# Altium PCB Ej6_Placa.PcbDoc
Units mm, origin at the board's own origin, x right, y up, seen from the top; angles counter-clockwise.
Board outline 50 x 50 mm, 2 copper layers (Top Layer, Bottom Layer); 24 components, 17 nets, 57 pads, 2 vias.
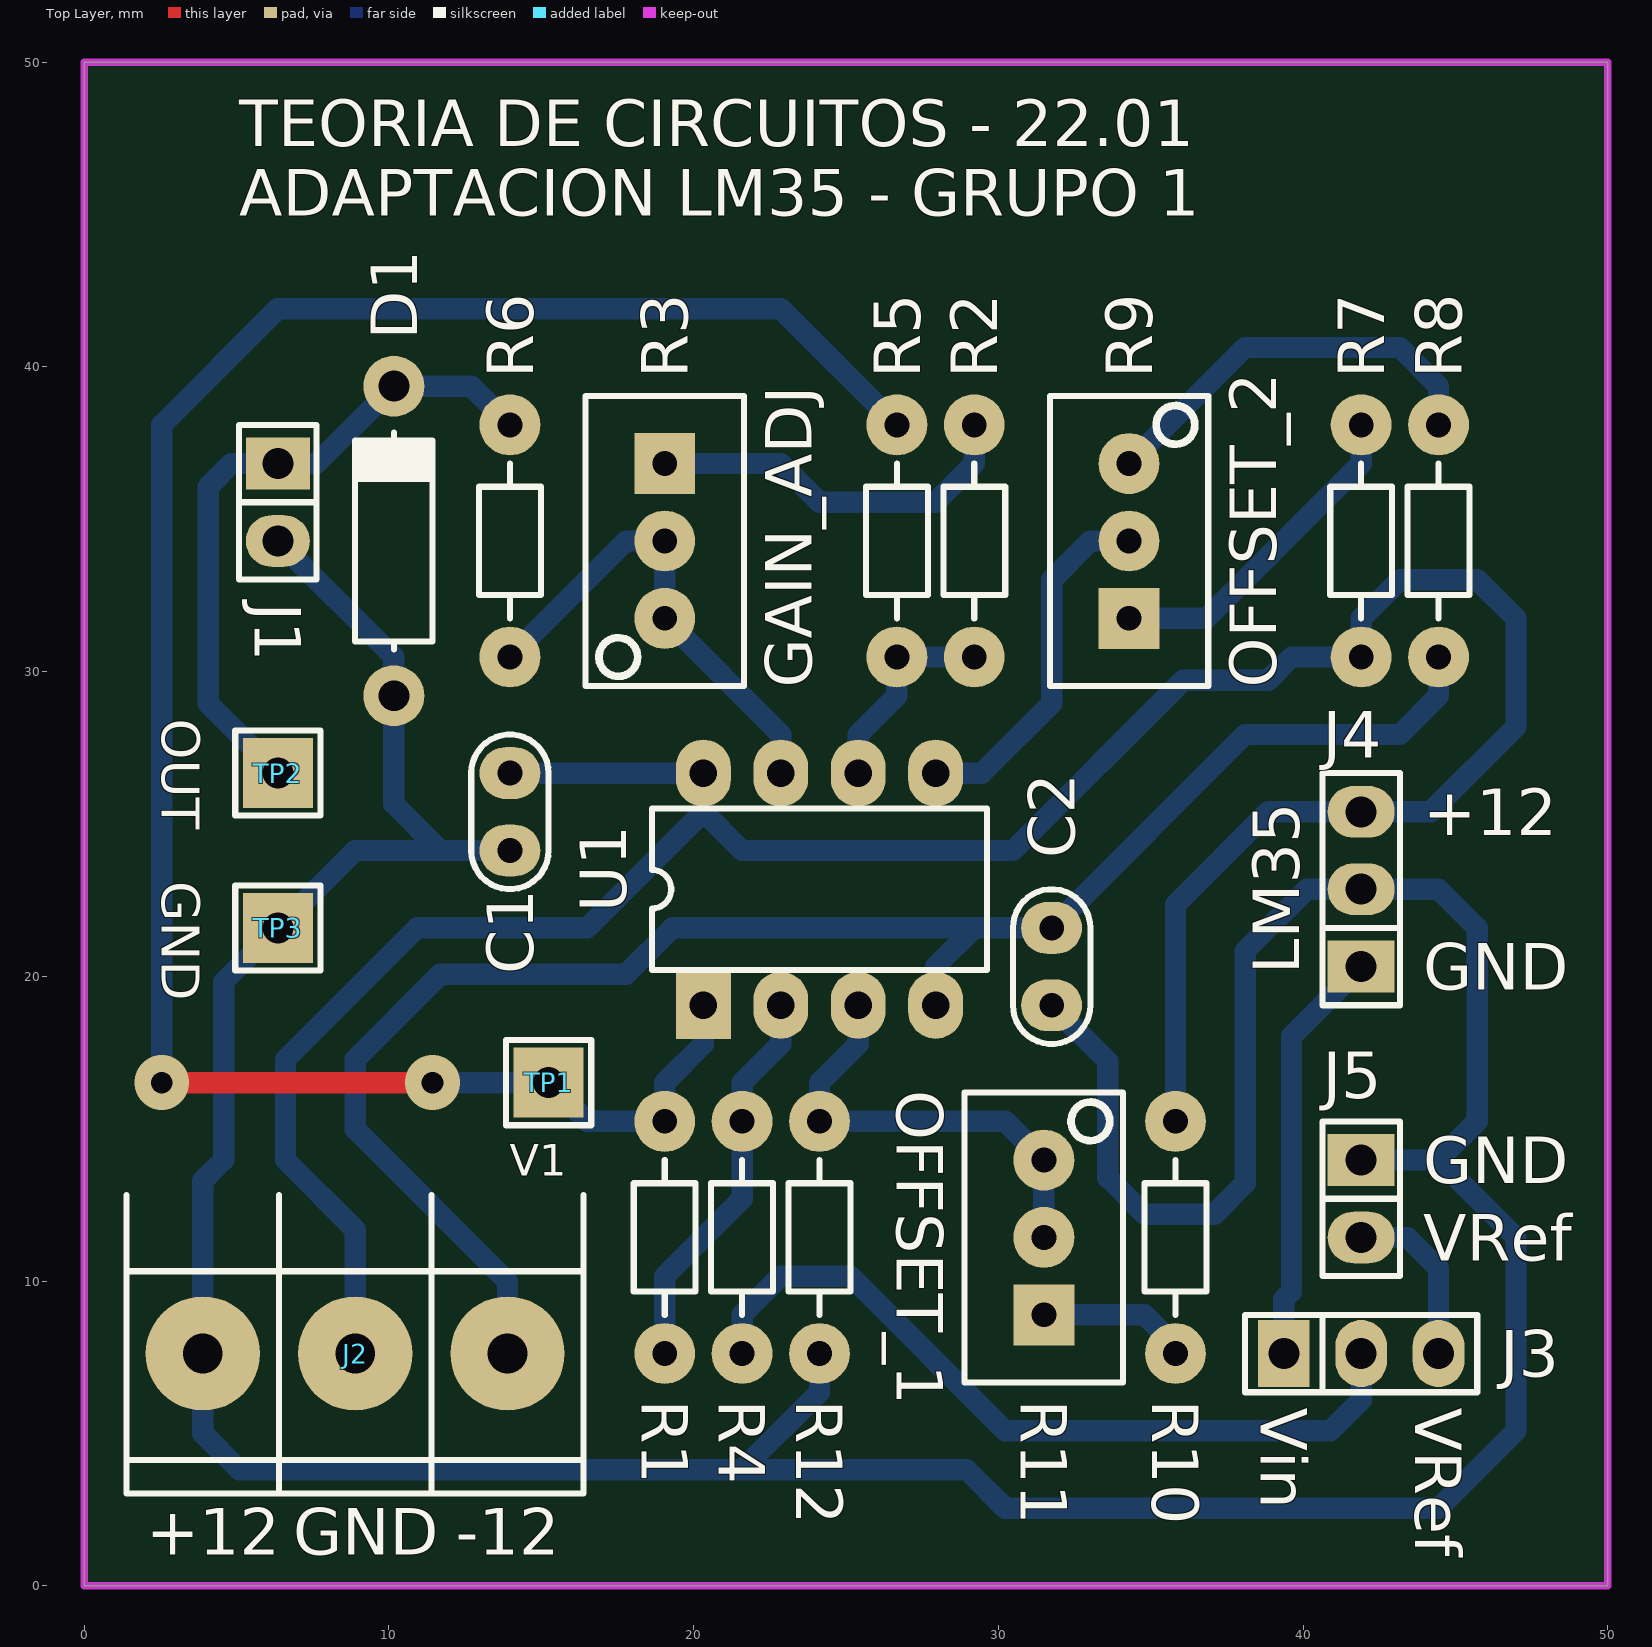
[diagram p0: Top Layer view]
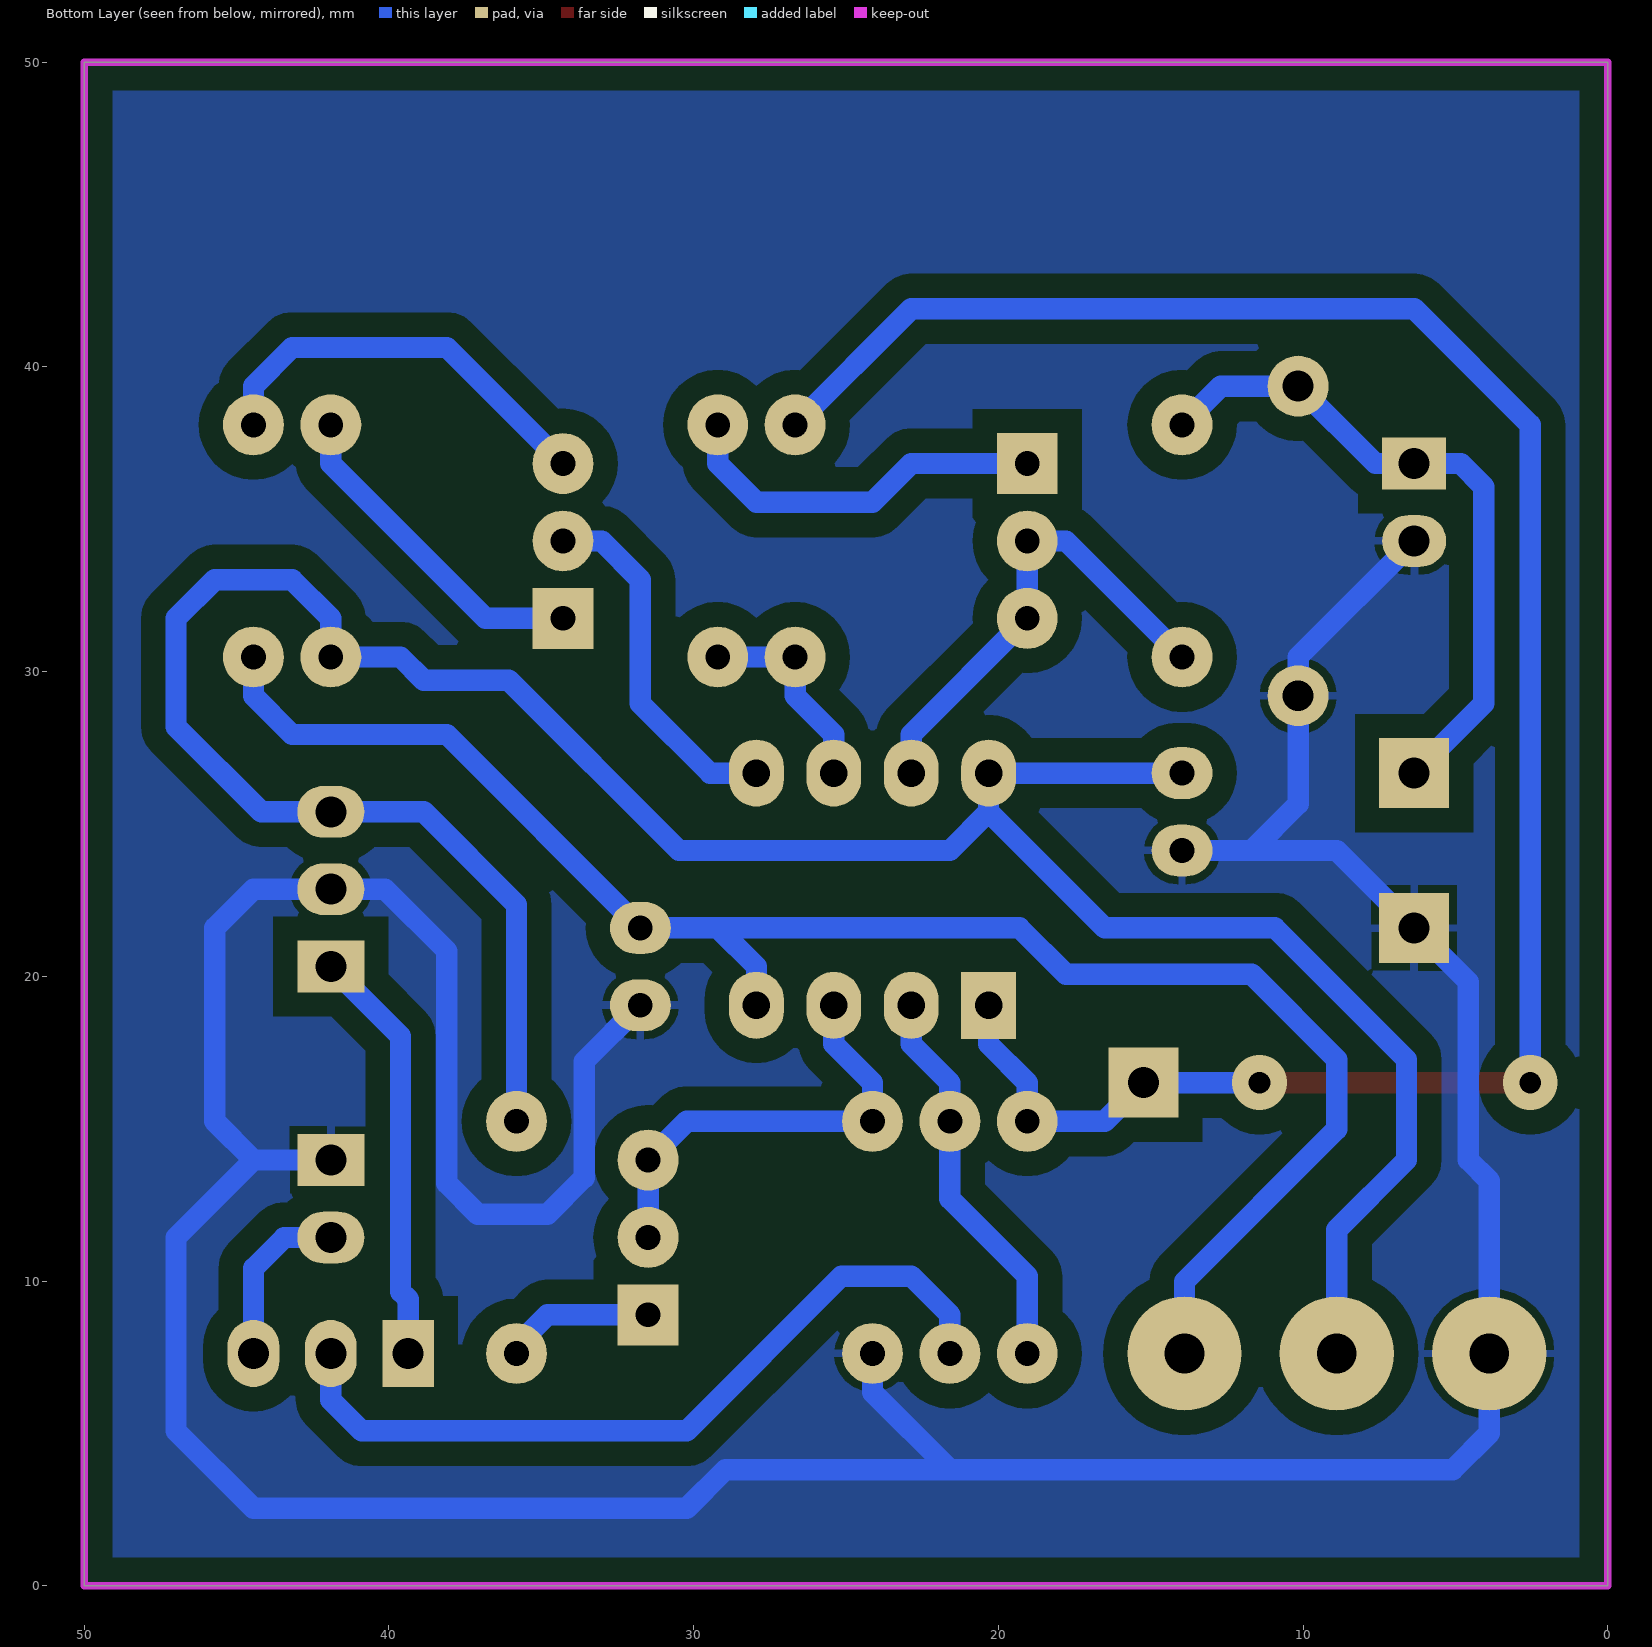
[diagram p1: Bottom Layer view, seen from below]
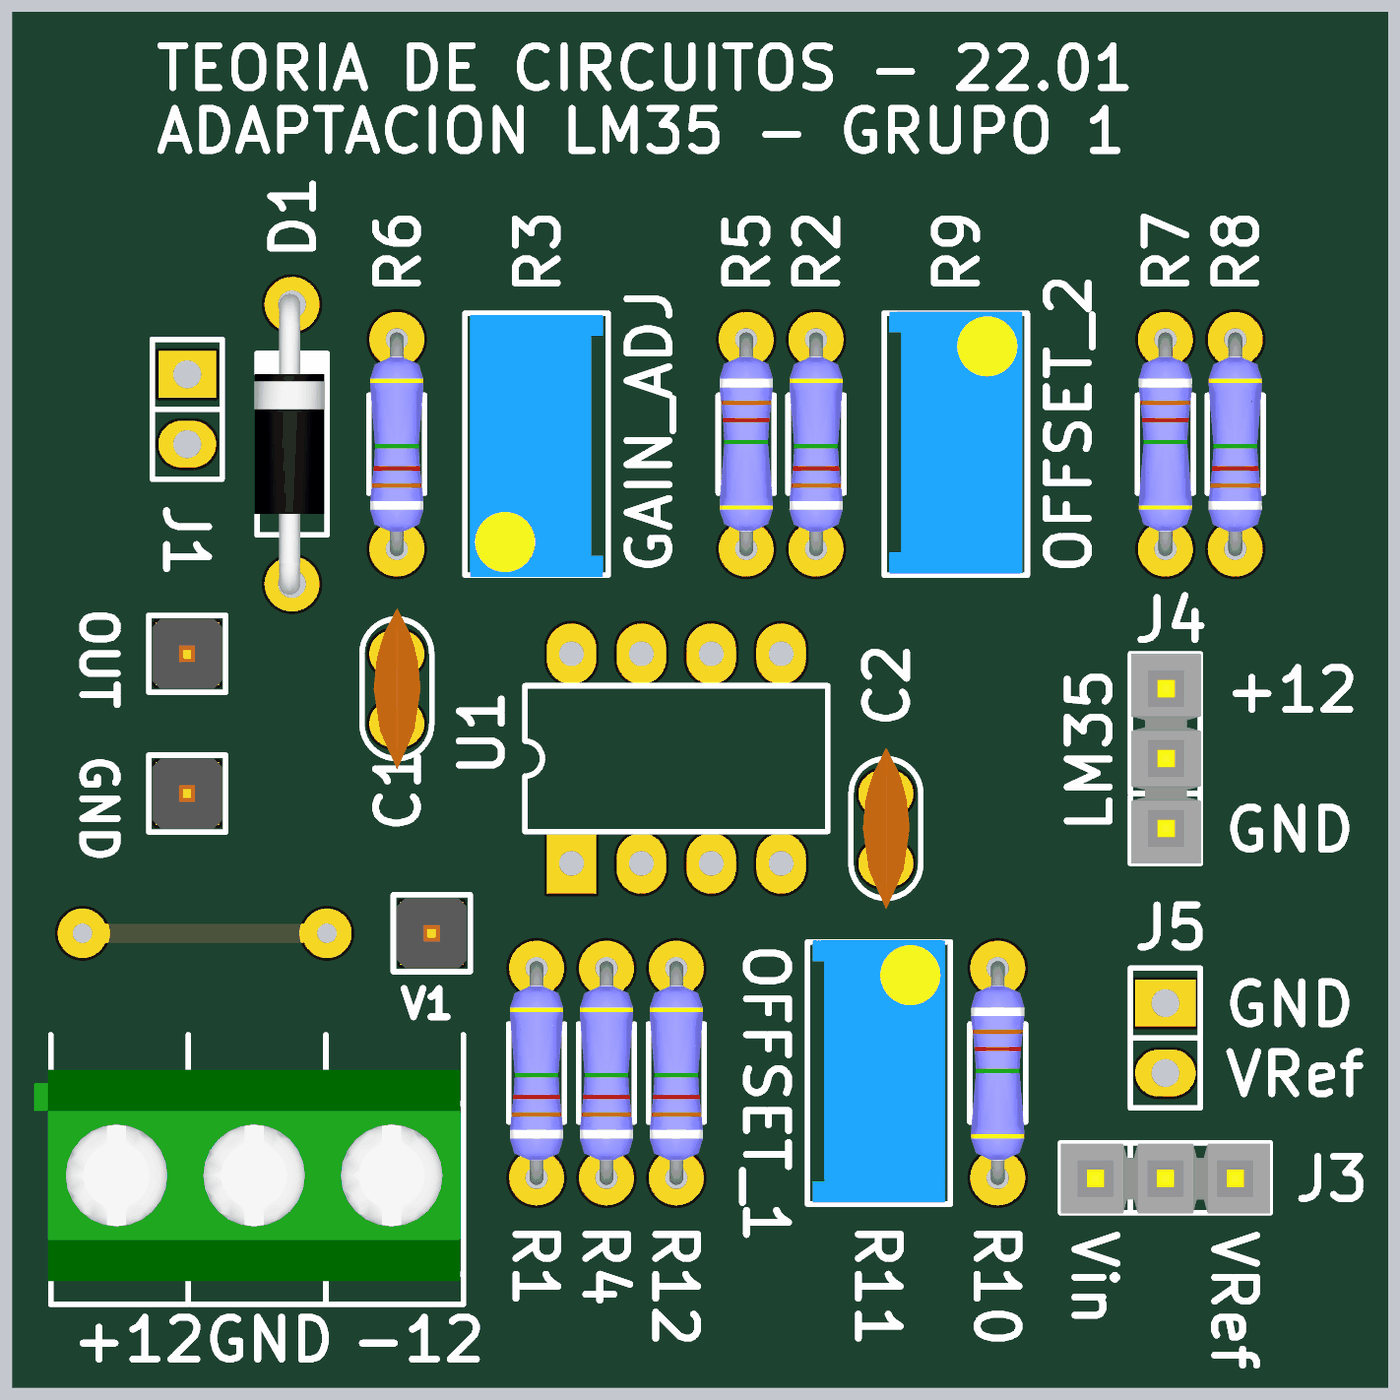
[diagram p2: 3D render of the assembled board from above, using the file's embedded part models]

## Layer stack, top to bottom
Top Solder: solder mask 0.0102, Solder Resist, Dk 3.5
Top Layer: signal copper 0.0356
Dielectric 1: dielectric 0.32, FR-4, Dk 4.8
Bottom Layer: signal copper 0.0356
Bottom Solder: solder mask 0.0102, Solder Resist, Dk 3.5

## Board outline
0,0 0,50 50,50 50,0

## Design rules (kind name [scope] priority, off if disabled: settings)
Clearance Clearance_1 [All] p1: gap=0.5
Clearance [InPolygon] p2: gap=0.8
PolygonConnect [All] p1: connectstyle=Relief reliefconductorwidth=0.254 reliefentries=4 polygonreliefangle="90 Angle" airgapwidth=0.254
RoutingVias [All] p1: holewidth=0.711 width=1.27 viastyle="Through Hole" minholewidth=0.711 minwidth=1.27 maxholewidth=0.711 maxwidth=1.27
SolderMaskExpansion [All] p1: expansion=0.102
Width [All] p1: maxlimit=0.7 minlimit=0.7 preferedwidth=0.7
30 further rules are at their usual default settings.

## Components (designator, comment, footprint, x,y, rotation, side; value= is the part's Value field where it differs from the comment)
C1 "100nF" CAP100 13.97,25.4 r270 top
C2 "100nF" CAP100 31.75,20.32 r270 top
D1 "1N4733" DO41 10.16,34.29 r90 top (schematic designator DZ1)
J1 "OUT" SIP2#1 6.35,35.56 r270 top
J2 "FUENTE" BORNERA3 8.89,7.62 r90 top
J3 "JUMPER PARA CALIBRACION" SIP3 41.91,7.62 r0 top
J4 "LM35" SIP3 41.91,22.86 r90 top
J5 "VRef_Ext" SIP2#2 41.91,12.7 r270 top
R1 "10K" RES300 19.05,7.62 r90 top
R2 "3K9" RES300 29.21,30.48 r90 top
R3 "5K" "PRESET V" 19.05,34.29 r270 top
R4 "1K" RES300 21.59,7.62 r90 top
R5 "1K" RES300 26.67,38.1 r270 top
R6 "10K" RES300 13.97,30.48 r90 top
R7 "220K" RES300 41.91,38.1 r270 top
R8 "220K" RES300 44.45,30.48 r90 top
R9 "10K" "PRESET V" 34.29,34.29 r90 top
R10 "330K" RES300 35.814,15.24 r270 top
R11 "50K" "PRESET V" 31.496,11.43 r90 top
R12 "10K" RES300 24.13,7.62 r90 top
TP1 "V1_CAL" TPTH 15.24,16.51 r0 top
TP2 "OUT_CAL" TPTH 6.35,26.67 r0 top
TP3 "GND" TPTH 6.35,21.59 r0 top
U1 "TL082CN" DIP8 24.13,22.86 r0 top

## Footprints (in the part's own frame and the unit in brackets; to place one, negate y for a bottom-side part, rotate by r counter-clockwise, add the part's x,y. Pads: shape width x height; smd on the part's side, far side on the other; paste and mask are expansions set on the pad)
BORNERA3 [mm] "Bornera con Tornillos 5mm separación"
  round 3.75 hole 1.3: 1(0,5) 2(0,0) 3(0,-5)
  silkscreen extent -4.6,-7.5 5.2,7.5, body extent -3.76,-7.39 3.94,8.11, height 10.05
CAP100 [mm]
  oval 1.7x2 hole 0.813: 1(-1.27,0) 2(1.27,0)
  silkscreen extent -2.54,-1.27 2.54,1.27, body extent -2.92,-0.84 2.92,0.86, height 6.12
DIP8 [mm] "DIP; 8 Leads; Row Spacing 7.62 mm; Pitch 2.54 mm"
  rect 1.8x2.2 hole 0.9: 1(-3.81,-3.81)
  oval 1.8x2.2 hole 0.9: 2(-1.27,-3.81) 3(1.27,-3.81) 4(3.81,-3.81) 5(3.81,3.81) 6(1.27,3.81) 7(-1.27,3.81) 8(-3.81,3.81)
  silkscreen extent -5.5,-2.65 5.5,2.65
DO41 [mm]
  round 2 hole 1.016: 1(-5.08,0) 2(5.08,0)
  silkscreen extent -3.56,-1.27 3.56,1.27, body extent -5.46,-1.19 5.46,1.37, height 2.03
"PRESET V" [mm]
  rect 2x2 hole 0.813: 1(-2.54,0)
  round 2 hole 0.813: 2(0,0) 3(2.54,0)
  silkscreen extent -4.76,-2.6 4.76,2.6, body extent -4.7,-2.42 4.83,2.42, height 11.55
RES300 [mm]
  round 2 hole 0.813: 1(0,0) 2(7.62,0)
  silkscreen extent 1.27,-1.02 6.35,1.02, body extent -0.25,-0.97 7.87,0.97, height 2.01
SIP2#1 [mm]
  rect 1.7x2.1 hole 1.016: 1(-1.27,0)
  oval 1.7x2.1 hole 1.016: 2(1.27,0)
  silkscreen extent -2.54,-1.27 2.54,1.27
SIP2#2 [mm]
  rect 1.7x2.2 hole 1.016: 1(-1.27,0)
  oval 1.7x2.2 hole 1.016: 2(1.27,0)
  silkscreen extent -2.54,-1.27 2.54,1.27
SIP3 [mm]
  rect 1.7x2.2 hole 1.016: 1(-2.54,0)
  oval 1.7x2.2 hole 1.016: 2(0,0) 3(2.54,0)
  silkscreen extent -3.81,-1.27 3.81,1.27, body extent -3.81,-1.3 3.81,1.24, height 8.38
TPTH [mm]
  rect 2.3x2.3 hole 1.016: 1(0,0)
  silkscreen extent -1.4,-1.4 1.4,1.4, body extent -1.27,-1.27 1.27,1.27, height 6.04

## Part data
C1 C2: library part CAP
D1: library part "DIODO ZENER"
J1 J5: library part CON2
J2: library part "BORNERA 3"
J3 J4: library part CON3
R1 R2 R4 R5 R6 R7 R8 R10 R12: library part RES
R3 R9 R11: library part PRESET
TP1 TP2 TP3: library part TP
U1: "General-Purpose J-FET Dual Operational Amplifier"

## Via types
v1: diameter 1.8, hole 0.711, Top Layer to Bottom Layer, 2 vias

## Nets (pads, with @x,y where several pads share a name; then routed paths per layer and width w, separated by ;. In a path a pad name is that pad's centre, name@x,y a point inside that pad or via, vN(x,y) a via of type N, cw(c..) or ccw(c..) an arc to the next point about the centre after c; other vN are vias at no path point)
+12: C1.1 J2.2 J4.3 R7.2 R10.1 U1.8 | length 91.7
  Bottom Layer w0.7: J2.2 8.89,11.684 6.604,13.97 6.604,17.272 10.922,21.59 16.51,21.59 20.32,25.4 ; C1.1 U1.8 20.32,25.4 ; R10.1 35.814,22.352 38.862,25.4 J4.3 44.196,25.4 46.99,28.194 46.99,31.75 45.72,33.02 43.18,33.02 41.91,31.75 R7.2 39.624,30.48 38.862,29.718 36.068,29.718 30.48,24.13 21.59,24.13 20.32,25.4
-12: C2.1 J2.3 R8.1 U1.4 | length 56.6
  Bottom Layer w0.7: J2.3 13.89,9.986 8.89,14.986 8.89,17.272 11.684,20.066 17.78,20.066 19.304,21.59 29.21,21.59 ; U1.4 27.94,20.32 29.21,21.59 ; R8.1 44.45,29.21 43.18,27.94 38.1,27.94 C2.1 29.21,21.59
GND: C1.2 C2.2 D1.1 J1.2 J2.1 J4.2 J5.1 R12.1 TP3.1 | length 137.8
  Bottom Layer w0.7: J1.2 10.16,30.48 D1.1 10.16,25.654 11.684,24.13 ; C1.2 11.684,24.13 ; R12.1 24.13,6.35 21.59,3.81 ; C2.2 33.596,17.204 33.596,13.394 34.798,12.192 37.084,12.192 38.1,13.208 38.1,20.828 40.132,22.86 J4.2 44.45,22.86 45.72,21.59 45.72,15.24 44.45,13.97 ; J5.1 44.45,13.97 ; 11.684,24.13 8.89,24.13 TP3.1 4.572,19.812 4.572,13.97 3.89,13.288 J2.1 3.89,5 5.08,3.81 21.59,3.81 ; 21.59,3.81 28.956,3.81 30.226,2.54 44.45,2.54 46.99,5.08 46.99,11.43 44.45,13.97
INPUT_OFFSET_A: R11.2 R11.3 R12.2 U1.3 | length 14.8
  Bottom Layer w0.7: U1.3 25.4,17.78 24.13,16.51 R12.2 30.226,15.24 R11.3 R11.2
NetDZ1_2: D1.2 J1.1 R6.2 TP2.1 | length 22.1
  Bottom Layer w0.7: TP2.1 4.064,28.956 4.064,36.068 4.826,36.83 J1.1 7.62,36.83 D1.2 12.7,39.37 R6.2
NetR1_1: R1.1 R4.2 U1.2 | length 13
  Bottom Layer w0.7: R1.1 19.05,10.16 21.59,12.7 R4.2 21.59,16.51 22.86,17.78 U1.2
NetR1_2: R1.2 R5.1 TP1.1 U1.1 | length 70.2
  Top Layer w0.7: v1(2.54,16.51) v1(11.43,16.51)
  Bottom Layer w0.7: v1(2.54,16.51) 2.54,38.1 6.35,41.91 22.86,41.91 R5.1 ; v1(11.43,16.51) TP1.1 16.51,15.24 R1.2 19.05,16.51 20.32,17.78 U1.1
NetR2_1: R2.1 R5.2 U1.6 | length 6.9
  Bottom Layer w0.7: U1.6 25.4,27.94 26.67,29.21 R5.2 R2.1
NetR2_2: R2.2 R3.1 | length 12.5
  Bottom Layer w0.7: R3.1 22.86,36.83 24.13,35.56 27.94,35.56 29.21,36.83 R2.2
NetR3_2: R3.2 R3.3 R6.1 U1.7 | length 15.9
  Bottom Layer w0.7: R6.1 17.78,34.29 R3.2 R3.3 22.86,27.94 U1.7
NetR7_1: R7.1 R9.1 | length 11
  Bottom Layer w0.7: R9.1 36.83,31.75 41.91,36.83 R7.1
NetR8_2: R8.2 R9.3 | length 13.5
  Bottom Layer w0.7: R9.3 38.1,40.64 43.18,40.64 44.45,39.37 R8.2
NetR9_2: R9.2 U1.5 | length 11.9
  Bottom Layer w0.7: U1.5 29.464,26.67 31.75,28.956 31.75,33.02 33.02,34.29 R9.2
NetR10_2: R10.2 R11.1 | length 5.1
  Bottom Layer w0.7: R11.1 34.798,8.89 R10.2@36.068,7.62
SENSOR_INPUT: J3.1 J4.1 | length 13.8
  Bottom Layer w0.7: J3.1 39.37,9.398 39.624,9.652 39.624,18.034 J4.1
SIGNAL_SELECT: J3.2 R4.1 | length 26.2
  Bottom Layer w0.7: R4.1 21.59,8.89 22.86,10.16 25.146,10.16 30.226,5.08 40.894,5.08 41.91,6.096 J3.2
VREF_INPUT: J3.3 J5.2 | length 5.8
  Bottom Layer w0.7: J5.2 43.434,11.43 44.45,10.414 J3.3

## Polygon pours and split planes (outlines as drawn)
GND on Bottom Layer "Top Overlay-No Net" (solid, remove dead copper, pour order 2): 0,50 50,50 50,0 0,0

## Keep-outs
Keep-Out Layer:
  the board outline again, w0.254

## Silkscreen, mask and mechanical layers (free items; w line width, h text height)
Top Overlay:
  text "TEORIA DE CIRCUITOS - 22.01" at 5.08,47.244 h1.52
  text "ADAPTACION LM35 - GRUPO 1" at 5.08,44.958 h1.52
  text "GAIN_ADJ" at 23.876,29.464 h1.52 r90
  text "OFFSET_2" at 39.116,29.464 h1.52 r90
  text "OUT" at 2.54,28.448 h1.25 r270
  text "+12" at 43.942,24.638 h1.52
  text "GND" at 2.54,23.114 h1.25 r270
  text "LM35" at 39.878,20.066 h1.52 r90
  text "GND" at 43.942,19.558 h1.52
  text "OFFSET_1" at 26.67,16.256 h1.52 r270
  text "V1" at 13.97,13.462 h1.02
  text "GND" at 43.942,13.208 h1.52
  text "VRef" at 43.942,10.668 h1.52
  text "Vin" at 38.608,5.842 h1.52 r270
  text "VRef" at 43.688,5.842 h1.52 r270
  text "+12" at 2.032,1.016 h1.52
  text "GND" at 6.858,1.016 h1.52
  text "-12" at 12.192,1.016 h1.52